# Altium PCB TB906_HW_V1.0.PcbDoc
Units mil, origin at the board's own origin, x right, y up, seen from the top; angles counter-clockwise.
Board outline 1310.5 x 1307.45 mil, 2 copper layers (Top, Bottom), stack 12.7 mil thick; 14 components, 16 nets, 74 pads, 167 vias.
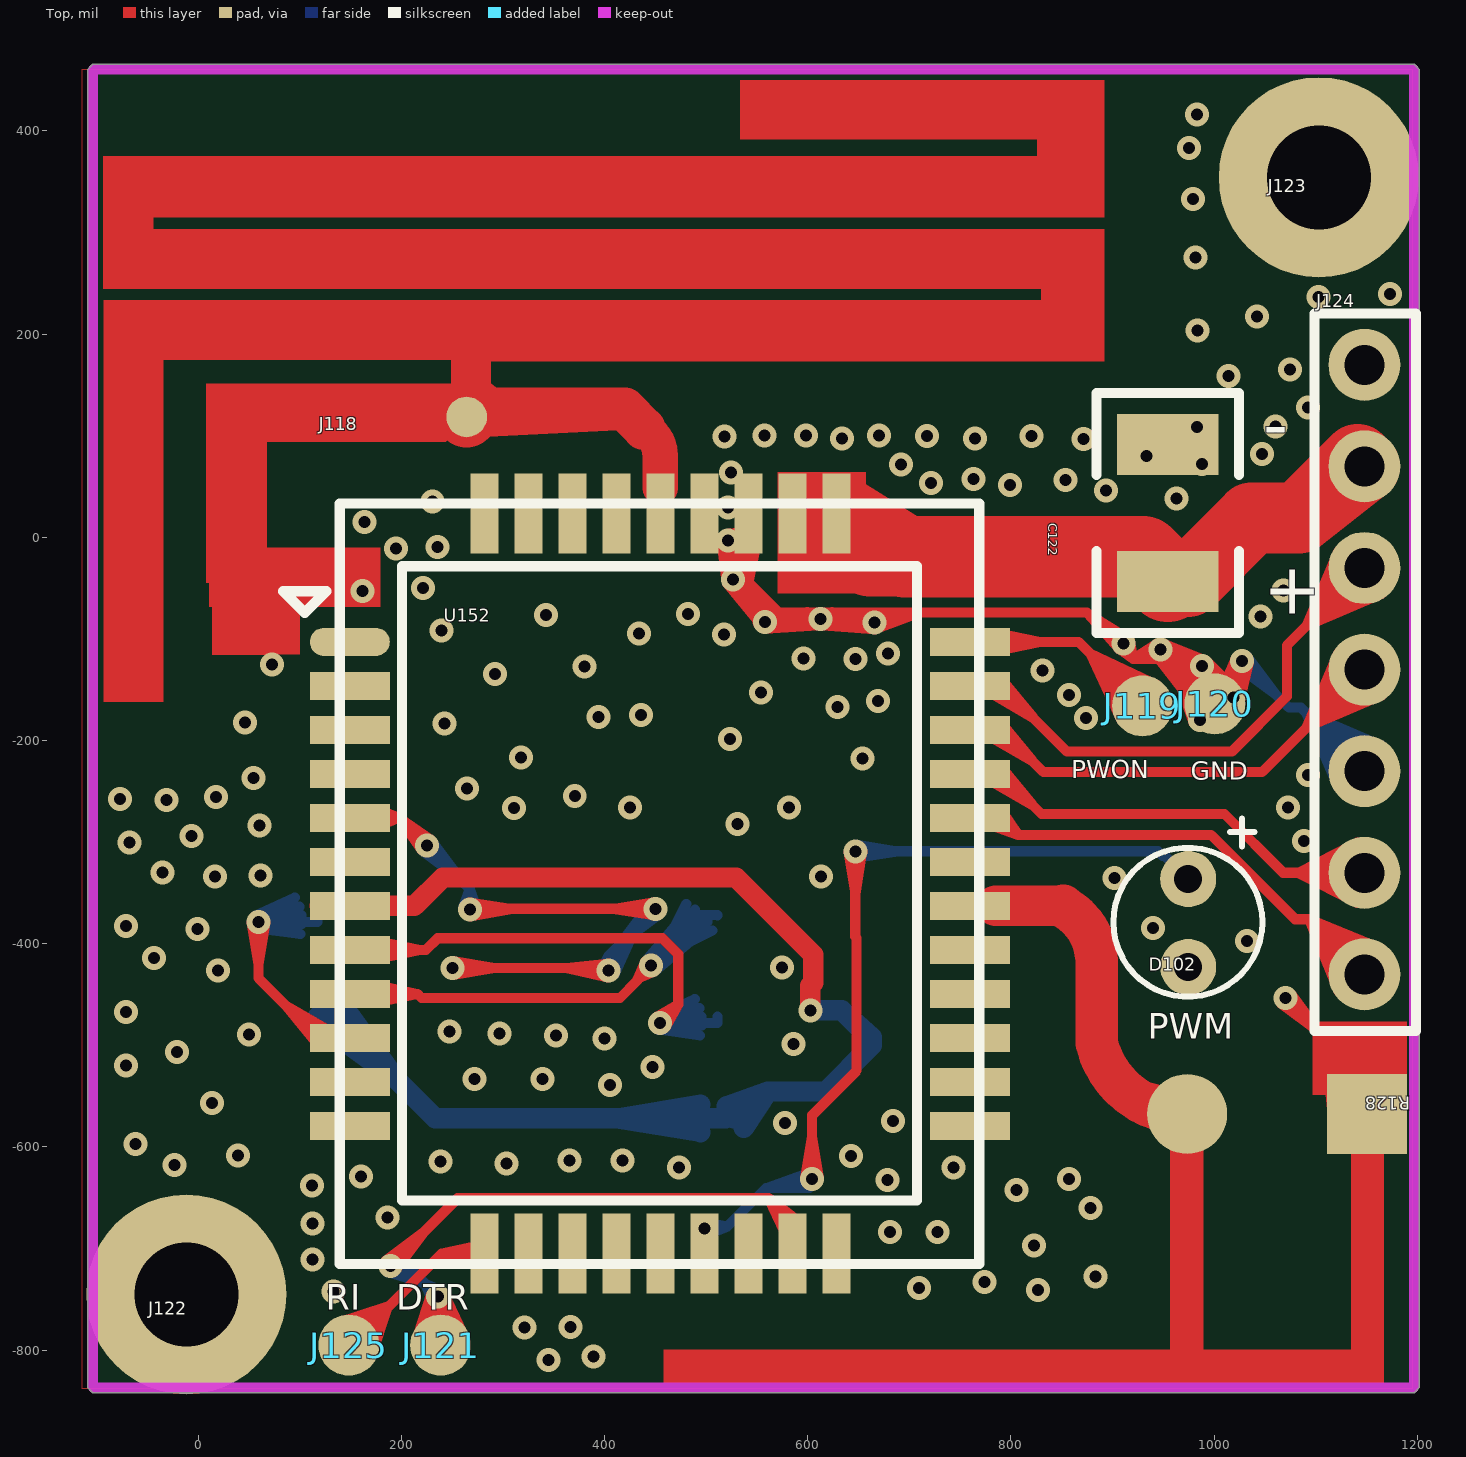
[diagram p0: Top view]
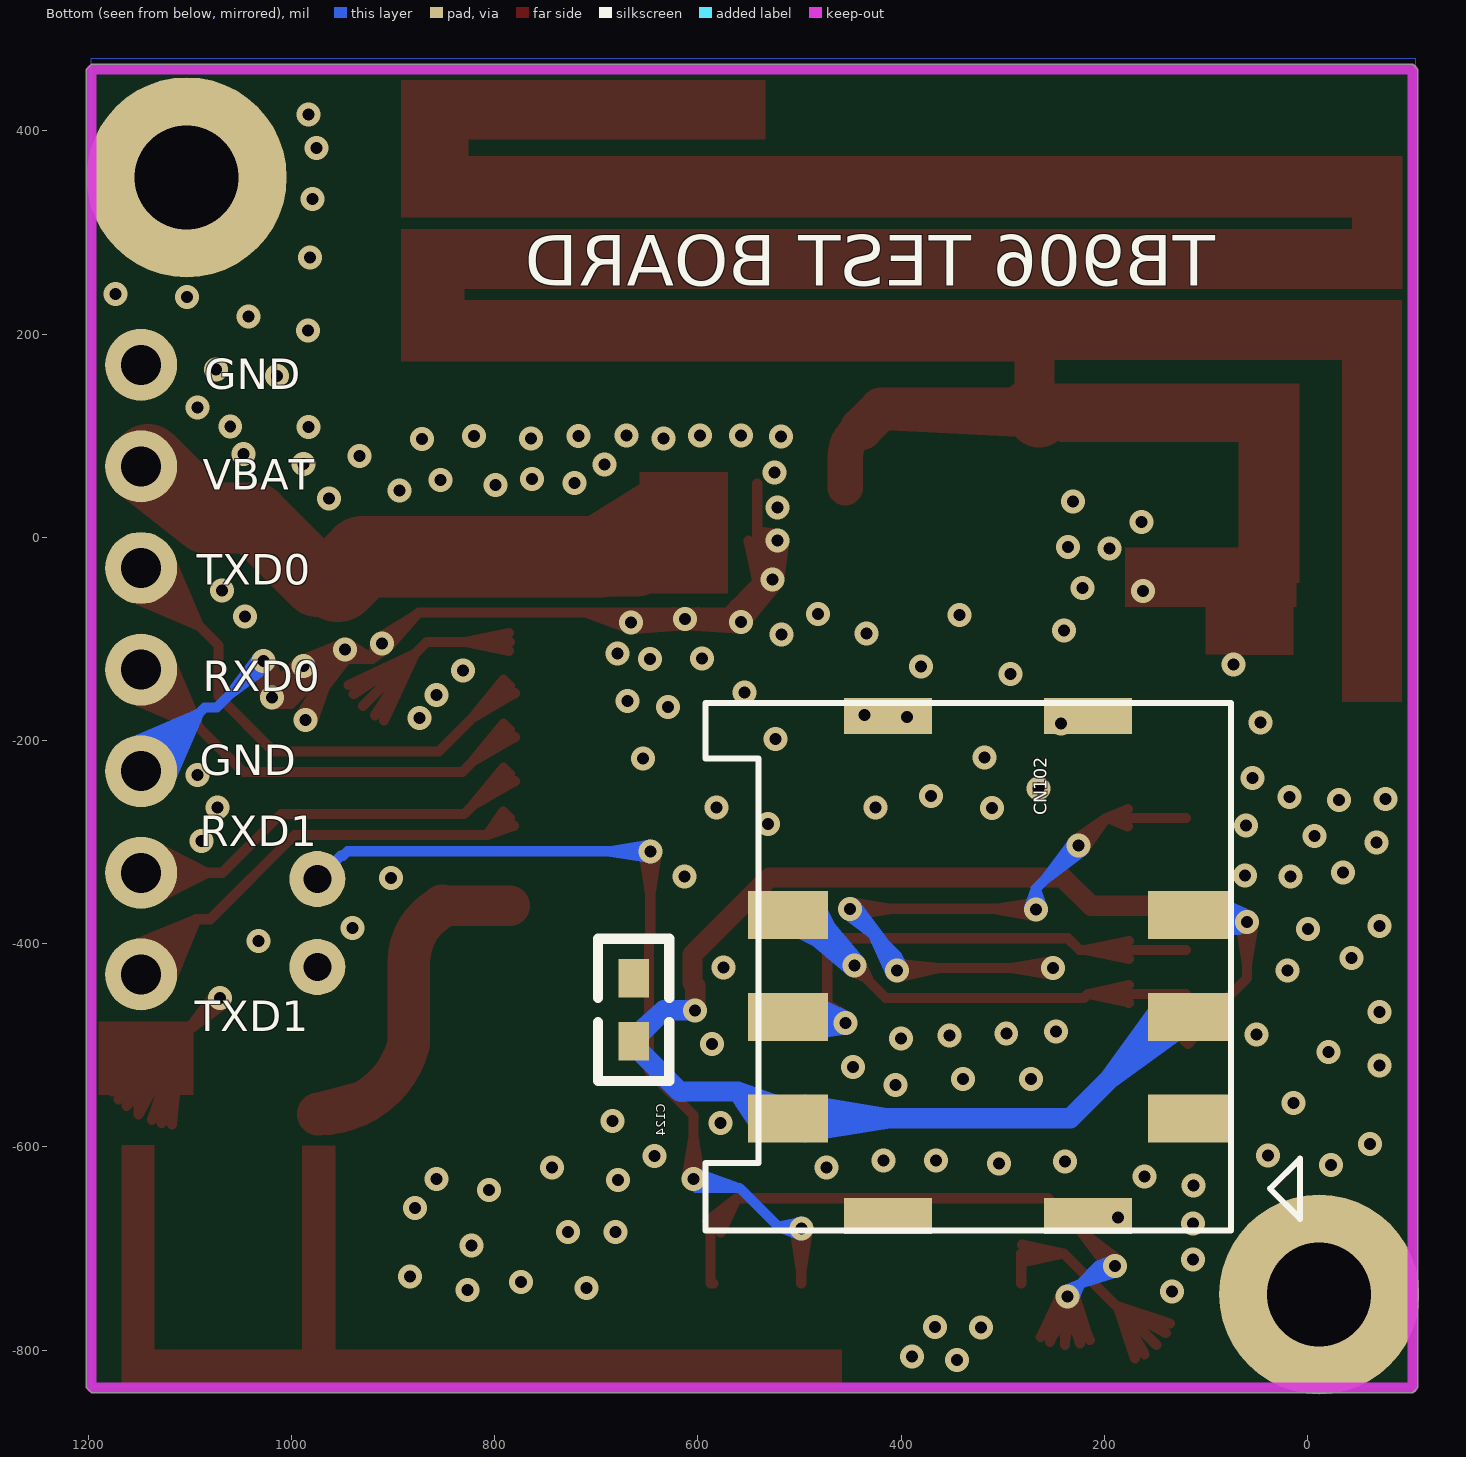
[diagram p1: Bottom view, seen from below]

## Layer stack, top to bottom
Top: signal copper 1.35
Dielectric: dielectric 10, FR-4, Dk 4.3
Bottom: signal copper 1.35

## Board outline
-108.57,-836.92 -103.57,-841.92 1196.93,-841.92 1201.93,-836.92 1201.93,460.53 1196.93,465.53 -103.57,465.53 -108.57,460.53

## Design rules (kind name [scope] priority, off if disabled: settings)
Clearance "'Default' PADS rule_15" [All] p1: gap=9
ComponentClearance "'Default' PADS rule_12" [All] p1: gap=6 collisioncheckmode=3 verticalgap=10 showdistances=FALSE
FlightTimeFalling "'Default' PADS rule_10" [All] p1: maximum=10.00
FlightTimeRising "'Default' PADS rule_9" [All] p1: maximum=10.00
Length "'Default' PADS rule_5" [All] p1: maxlimit=50000 minlimit=0
MatchedLengths "'Default' PADS rule_11" [InNetClass('All Nets')] p1: tolerance=200 checknetsindiffpair=TRUE checkdiffpairvsdiffpair=TRUE checkothers=TRUE
MaxMinImpedance "'Default' PADS rule_8" [All] p1: minimum=50.00 maximum=150.0
ParallelSegment "'Default' PADS rule_7" [All] p1: limit=1000 gap=200
ParallelSegment "'Default' PADS rule_6" [All] p2: limit=1000 gap=200
PasteMaskExpansion "Paste Mask Expansion from CAM settings" [All] p1: expansion=1
PlaneClearance "'Default' PADS rule_14" [All] p1: clearance=9
PlaneConnect "Power Plane Connect Style - from global settings" [All] p1: planeconnectstyle=Relief reliefexpansion=20 reliefentries=2 reliefconductorwidth=15 reliefairgap=10
PolygonConnect [All] p1: connectstyle=Relief reliefconductorwidth=10 reliefentries=4 polygonreliefangle="90 Angle"
RoutingLayers "'Default' PADS rule_3" [All] p1: top layer_v5=TRUE bottom layer_v5=TRUE
RoutingPriority "'Default' PADS rule_2" [All] p1: routingpriority=3
RoutingTopology "'Default' PADS rule" [All] p1: topology=Shortest
RoutingVias "'Default' PADS rule_4" [All] p1: holewidth=11.81 width=23.62 viastyle="Through Hole" minholewidth=11.81 minwidth=23.62 maxholewidth=11.81 maxwidth=23.62
SilkscreenOverComponentPads [All] p1: minsilkscreentomaskgap=10
SolderMaskExpansion "Solder Mask Expansion from CAM settings" [All] p1: expansion=1
Width "'Default' PADS rule_13" [All] p1: maxlimit=250 minlimit=8 preferedwidth=10
20 further rules are at their usual default settings.

## Components (designator, comment, footprint, x,y, rotation, side; value= is the part's Value field where it differs from the comment)
C122 "1210" 1210 954.39,23.93 r90 top
C124 "0603" 0603 663.14,-465.17 r90 bottom
CN102 "C790-6P" C790-6P 216.06,-667.99 r90 bottom
D102 "D3.9_LED" D3.9_LED 904.49,-709.15 r270 top
J118 "TB906_ANT" TB906_ANT 220.08,-28.46 r0 top
J119 "TP60MIL" TP60MIL 929.54,-165.93 r0 top
J120 "TP60MIL" TP60MIL 1000.79,-164 r0 top
J121 "TP60MIL" TP60MIL 238.81,-795.13 r0 top
J122 "VIA_2.5MM" VIA_2.5MM -11.57,-745.24 r0 top
J123 "VIA_2.5MM" VIA_2.5MM 1103.11,354.28 r0 top
J124 "SDIP_2.54_7P" SDIP_2.54_7P 1148.03,169.76 r180 top
J125 "TP60MIL" TP60MIL 148.44,-795.13 r0 top
R128 "BT_F_ANT" BT_F_ANT 973.56,-567.62 r180 top
U152 "HFY_QFN_42_DTU" HFY_QFN_42_DTU 139.5,33.2 r0 top

## Footprints (in the part's own frame and the unit in brackets; to place one, negate y for a bottom-side part, rotate by r counter-clockwise, add the part's x,y. Pads: shape width x height; smd on the part's side, far side on the other; paste and mask are expansions set on the pad)
0603 [mil]
  rect 38x30 smd: 1(-31,0) 2(31,0)
  silkscreen extent -70,-35 70,35
1210 [mil]
  rect 60x100 smd: 1(-67.5,0) 2(67.5,0)
  silkscreen extent -118,-70 118,70
BT_F_ANT [mm]
  round 2 smd: 1(0,0)
  rect 2x2 smd: 2(-4.494,0.005)
  Top region: 13.082,6.713 -4.915,6.713 -4.915,5.893 13.082,5.893 13.082,6.713
  Top region: -0.399,5.908 0.419,5.908 0.419,0.79 -0.399,0.79 -0.399,5.908
  Top region: -4.915,5.898 -4.097,5.898 -4.097,0.78 -4.915,0.78 -4.915,5.898
C790-6P [mm]
  rect 1.2x2 smd: C1(2.44,7.5) C2(4.98,7.5) C3(7.52,7.5) C5(2.44,-2.5) C6(4.98,-2.5) C7(7.52,-2.5)
  rect 0.9x2.2 smd: C4(12.5,0) C8(0,0) C9(0,5) C10(12.5,5)
  silkscreen extent -0.36,-5.31 12.83,9.56
D3.9_LED [mm]
  round 1.4 hole 0.7: 1(-9.47,1.78) 2(-7.27,1.78)
  silkscreen extent -10.98,-0.09 -6.53,3.63
HFY_QFN_42_DTU [mm]
  oval 2x0.7 smd: 1(0.25,-3.459)
  rect 2x0.7 smd: 2(0.25,-4.559) 3(0.25,-5.659) 4(0.25,-6.759) 5(0.25,-7.859) 6(0.25,-8.959) 7(0.25,-10.059) 8(0.25,-11.159) 9(0.25,-12.259) 10(0.25,-13.359) 11(0.25,-14.459) 12(0.25,-15.559) 22(15.75,-15.559) 23(15.75,-14.459) 24(15.75,-13.359) 25(15.75,-12.259) 26(15.75,-11.159) 27(15.75,-10.059) 28(15.75,-8.959) 29(15.75,-7.859) 30(15.75,-6.759) 31(15.75,-5.659) 32(15.75,-4.559) 33(15.75,-3.459)
  rect 0.7x2 smd: 13(3.612,-18.75) 14(4.712,-18.75) 15(5.812,-18.75) 16(6.912,-18.75) 17(8.012,-18.75) 18(9.112,-18.75) 19(10.212,-18.75) 20(11.312,-18.75) 21(12.412,-18.75) 34(12.412,-0.25) 35(11.312,-0.25) 36(10.212,-0.25) 37(9.112,-0.25) 38(8.012,-0.25) 39(6.912,-0.25) 40(5.812,-0.25) 41(4.712,-0.25) 42(3.612,-0.25)
  silkscreen extent -1.42,-19.01 15.99,0
SDIP_2.54_7P [mm]
  round 1.8 hole 1: 1(0,0) 2(0,2.54) 3(0,5.08) 4(0,7.62) 5(0,10.16) 6(0,12.7) 7(0,15.24)
  silkscreen extent -1.29,-1.28 1.25,16.65
TB906_ANT [mil]
  round 40 smd: 1(44.24,146.92)
  Top region: 671.88,343.45 671.88,478.24 313.66,478.24 313.66,420.41 605.92,420.41 605.92,343.45 671.88,343.45
  Top region: 29.25,179.48 29.25,203.03 -254.13,203.03 -254.13,-133.32 -312.94,-133.32 -312.94,262.01 610.05,262.01 610.05,273.29 -313.35,273.29 -313.35,403.48 671.94,403.48 671.94,343.31 -264.37,343.31 -264.37,331.56 672.01,331.56 672.01,201.85 67.8,201.85 67.8,127.69 28.87,127.69 23.9,122.72 -152.53,122.72 -152.53,-16.09 -211.84,-16.09 -211.84,179.48 29.25,179.48
TP60MIL [mil]
  round 60 smd: 1(0,0)
VIA_2.5MM [mm]
  round 5 hole 2.6: 1(0,0)

## Via types
v1: diameter 23.62, hole 11.81, Top to Bottom, 167 vias

## Nets (pads, with @x,y where several pads share a name; then routed paths per layer and width w, separated by ;. In a path a pad name is that pad's centre, name@x,y a point inside that pad or via, vN(x,y) a via of type N, cw(c..) or ccw(c..) an arc to the next point about the centre after c; other vN are vias at no path point)
DTR: J121.1 U152.20 | length 1881.2
  Top w10: v1@184.77,-711.88 222.24,-684.01 v1@194.37,-721.48 ; v1(189.22,-717.03) 255.63,-650.62 561.56,-650.62 ; J121.1@214.34,-790.01 v1(236.05,-747.27) ; J121.1@223.88,-793.64 v1(236.05,-747.27) ; v1@229.34,-746.08 J121.1@225.34,-788.1 ; v1@229.75,-744.67 J121.1@216.47,-785.83 ; v1@229.92,-750.24 251.55,-787.03 v1@242.57,-745.31 ; v1@230.68,-751.46 260.45,-784.09 v1@242,-743.96 ; v1@241.86,-750.82 J121.1@216.47,-785.83 ; v1@242.48,-749.52 J121.1@225.34,-788.1 ; J121.1@253.47,-791.93 v1(236.05,-747.27) ; J121.1@262.53,-787.23 v1(236.05,-747.27) ; U152.20@577.44,-684.08 561.56,-650.62 ; U152.20@584.87,-734.51 587.6,-734.51 587.6,-676.66 561.56,-650.62 ; U152.20@584.87,-679.4 561.56,-650.62 ; U152.20@590.99,-673.1 561.56,-650.62 ; J121.1@216.47,-785.83 v1(236.05,-747.27) ; J121.1@225.34,-788.1 v1(236.05,-747.27) ; v1(236.05,-747.27) J121.1 v1(236.05,-747.27) ; J121.1@238.46,-789.03 229.31,-748.21 J121.1@238.46,-789.03 ; J121.1@238.46,-789.03 242.86,-747.43 J121.1@238.46,-789.03
  Bottom w10: v1@186.68,-723.35 223.46,-734.45 ; v1@192.83,-711.26 223.46,-734.45 ; v1@230.4,-751.08 223.46,-734.68 ; v1(236.05,-747.27) 223.46,-734.68 ; v1@239.86,-741.62 223.46,-734.68 ; v1(189.22,-717.03) 206.03,-717.03 ; v1(189.22,-717.03) 223.46,-734.45 ; v1(189.22,-717.03) 206.03,-717.03 ; 206.03,-717.03 190.6,-723.7 206.03,-717.03 ; 206.03,-717.03 190.6,-710.36 206.03,-717.03 ; 206.03,-717.03 223.46,-734.45 ; 223.46,-734.68 223.46,-734.45
GND: C122.2 C124.2 CN102.C4 CN102.C5 CN102.C8 CN102.C9 CN102.C10 D102.2 J120.1 J122.1 J123.1 J124.1 J124.5 R128.2 U152.5 U152.26 U152.28 U152.36 U152.37 U152.39 U152.40 | length 13080.5
  Top w10: U152.5@119.82,-276.19 197.83,-276.19 ; U152.5@174.93,-276.2 197.83,-276.19 ; U152.5@176.62,-284.81 197.83,-276.19 ; U152.5@176.61,-267.58 197.83,-276.19 ; v1@219.95,-307.9 197.83,-276.19 ; v1@229.54,-298.31 197.83,-276.19 ; v1(250.64,-424.08) 401.65,-424.08 v1(404.13,-426.56) 362.04,-424.08 ; v1@251.19,-430.87 292.45,-424.08 v1@251.19,-417.29 ; v1@267.88,-359.5 309.25,-365.67 ; v1@268.08,-373.07 309.25,-365.67 ; v1@403.18,-433.3 362.04,-424.08 ; v1@403.98,-419.75 362.04,-424.08 ; v1@449.55,-372.46 408.29,-365.67 v1@449.55,-358.88 ; v1(450.1,-365.67) 268.05,-365.67 v1(267.43,-366.29) 309.25,-365.67 ; v1@515,-3.53 v1@520.2,-38.44 ; v1@515,-3.49 v1@520,-38.91 ; v1@514.99,-3.43 v1@519.74,-39.68 ; v1@515.45,-5.63 v1@533.12,-41.96 ; v1@515.9,-6.58 541.56,-44.25 ; v1@520.77,-45.34 v1@550.32,-81.27 ; v1@520.85,-37.37 U152.36@550.29,-3.15 ; v1@521.31,-46.01 v1@555.91,-78.78 ; v1@521.9,-46.58 v1@561.09,-75.72 ; v1@522.65,3.58 U152.36@541.56,-2.23 ; v1@522.93,-47.31 564.9,-67.59 ; v1@523.29,-9.82 U152.36@541.56,-2.23 ; U152.36@528.14,-0.69 541.56,-44.25 ; U152.36@528.47,-1.83 v1@533.12,-41.96 ; U152.36@528.54,-4.14 v1@520.2,-38.44 ; v1@530.56,-36.07 564.9,-67.59 ; v1@531.44,-36.91 v1@561.09,-75.72 ; v1@531.96,-37.58 v1@555.91,-78.78 ; v1@532.36,-44.58 U152.36@550.29,-3.15 ; v1@532.41,-38.33 v1@550.32,-81.27 ; v1@532.86,-43.36 U152.36@541.56,-2.23 ; v1@532.94,-43.03 U152.36@541.56,6.39 ; U152.36@541.56,52.89 541.56,-44.25 ; v1@551.28,-85.33 541.56,-44.25 ; v1@556.78,-76.49 599.55,-73.72 ; v1@556.89,-76.48 602.32,-74.08 ; v1@557.72,-90.04 v1@611.08,-86.97 ; v1@557.82,-76.42 v1(612.65,-80.34) ; v1@558.54,-90 v1(612.65,-80.34) ; v1@558.67,-76.48 v1@611.08,-86.97 ; v1@559.63,-89.78 602.32,-74.08 ; v1@559.79,-89.73 599.55,-73.72 ; v1@563.82,-80.12 541.56,-44.25 ; v1@612.2,-73.54 655.73,-74.08 ; v1@613.12,-73.55 571.39,-74.08 ; v1@663.8,-90.13 624.11,-73.69 ; v1@663.97,-90.18 v1@621.42,-74.08 ; v1@664.96,-76.9 710.03,-74.08 ; v1@665.02,-76.9 v1@614.15,-86.98 ; v1@665.04,-90.41 v1(612.65,-80.34) ; v1@665.89,-90.46 v1@614.15,-86.98 ; v1@665.89,-76.84 v1(612.65,-80.34) ; v1@666.83,-76.9 v1@621.42,-74.08 ; v1@666.95,-76.92 624.11,-73.69 ; v1@667.84,-90.18 710.03,-74.08 ; v1@905.95,-109.48 920.4,-119.65 ; v1@906.09,-109.63 875.9,-75.15 ; v1@914.87,-99.26 875.9,-75.15 ; v1@917.2,-102.27 920.4,-119.65 ; v1@941.47,-114.34 968.33,-149.07 ; v1@941.93,-114.96 972.97,-146.88 ; v1@942.73,-115.77 J120.1@980.27,-143.49 ; v1@943.69,-116.46 v1@983.53,-136.1 ; v1@944.22,-104.46 920.4,-119.65 ; v1@944.39,-116.82 v1@985.68,-131.47 ; v1@948.55,-117.27 920.4,-119.65 ; v1@950.86,-104.88 v1@985.68,-131.47 ; v1@951.49,-105.34 v1@983.53,-136.1 ; v1@952.3,-106.13 J120.1@980.27,-143.49 ; v1@952.99,-107.09 972.97,-146.88 ; v1@953.36,-107.79 968.33,-149.07 ; J120.1@979.61,-182.18 968.15,-138.95 ; J120.1@979.81,-182.7 965.07,-141.02 ; J120.1@979.95,-177.8 956.43,-119.65 ; v1@982.81,-131.24 J120.1@1014.63,-163.04 ; v1@982.83,-131.25 J120.1@1015.09,-163.41 ; v1@983.32,-131.76 J120.1@1010.05,-152.2 ; v1@985.07,-132.96 J120.1@1014.59,-143.15 ; J120.1@988.99,-173.26 956.43,-119.65 ; J120.1@991.77,-176.26 965.07,-141.02 ; J120.1@992.06,-176.75 968.15,-138.95 ; v1@992.16,-121.42 J120.1@1014.59,-143.15 ; v1@992.42,-121.63 J120.1@1022.76,-152.17 ; v1@992.43,-121.65 J120.1@1022.19,-151.83 ; v1@993.55,-122.88 J120.1@1010.05,-152.2 ; J120.1@1012.3,-158.4 J120.1@1014.59,-143.15 ; J120.1@1015.83,-151.92 J120.1 ; J120.1@1020.07,-164.64 J120.1 ; v1@1020.85,-121.93 J120.1@1025.71,-159.51 ; v1@1020.92,-120.71 v1(1019.09,-157.9) ; v1@1021.19,-119.53 J120.1@1013.26,-154.38 ; v1@1021.61,-118.53 J120.1@1003.03,-161.76 ; J120.1@1025,-154.52 J120.1@1014.59,-143.15 ; v1@1033.19,-125.65 J120.1@1003.03,-161.76 ; v1@1033.6,-125 J120.1@1013.26,-154.38 ; v1@1034.12,-123.84 v1(1019.09,-157.9) ; v1@1034.4,-122.63 J120.1@1025.71,-159.51 ; v1@1065.75,-458.74 1103.22,-486.61 v1@1075.35,-449.14 ; v1(1070.2,-453.59) 1150.5,-533.89 1150.5,-567.82 1109.34,-492.73 ; R128.2@1117.66,-577.95 1109.34,-492.73 ; R128.2@1127.68,-576.37 1109.34,-492.73 ; R128.2@1137.37,-573.64 1109.34,-492.73 ; R128.2@1162.48,-559.88 1109.34,-492.73 ; R128.2@1169.99,-553.18 1109.34,-492.73 ; R128.2@1176.71,-545.58 1109.34,-492.73 ; 197.83,-276.19 v1(225.17,-303.53) 197.83,-276.19 ; v1@519.74,-39.68 v1(521.8,-3.18) ; v1@519.74,-39.68 528.53,-4.19 v1@520,-38.91 ; v1@519.74,-39.68 U152.36@532.83,-3.15 ; v1@520,-38.91 v1(521.8,-3.18) ; v1@520,-38.91 U152.36@541.56,6.39 ; v1@520.2,-38.44 v1(521.8,-3.18) ; v1@520.2,-38.44 U152.36@541.56,-2.23 ; v1(521.8,-3.18) v1(526.33,-41.41) ; v1(521.8,-3.18) v1@533.12,-41.96 ; v1(521.8,-3.18) v1(526.33,-41.41) ; v1(521.8,-3.18) U152.36@541.56,6.39 ; v1(521.8,-3.18) U152.36@541.56,6.39 ; v1(521.8,-3.18) U152.36@541.56,-2.23 ; v1(521.8,-3.18) 541.56,-44.25 ; v1(526.33,-41.41) 515.13,-4.58 v1(526.33,-41.41) ; v1(526.33,-41.41) 528.61,-2.98 v1(526.33,-41.41) ; v1(526.33,-41.41) U152.36@532.83,-3.15 ; v1(526.33,-41.41) 541.56,-44.25 ; v1(526.33,-41.41) 541.56,-44.25 ; v1(526.33,-41.41) v1@555.91,-78.78 ; v1(526.33,-41.41) 541.56,-44.25 ; v1(526.33,-41.41) v1@561.09,-75.72 ; v1(526.33,-41.41) 541.56,-44.25 ; v1(526.33,-41.41) v1@550.32,-81.27 ; v1(526.33,-41.41) 541.56,-44.25 ; v1(526.33,-41.41) U152.36@541.56,6.39 ; v1(526.33,-41.41) 541.56,-44.25 ; v1(526.33,-41.41) 564.9,-67.59 ; v1(526.33,-41.41) 541.56,-44.25 ; v1(526.33,-41.41) U152.36@541.56,-2.23 ; v1(526.33,-41.41) 541.56,-44.25 ; v1(526.33,-41.41) U152.36@550.29,-3.15 ; v1@526.58,-48.22 541.56,-44.25 ; v1@526.58,-48.22 541.56,-44.25 ; v1@526.58,-48.22 541.56,-44.25 ; v1@526.58,-48.22 541.56,-44.25 ; v1@526.58,-48.22 541.56,-44.25 ; v1@526.58,-48.22 541.56,-44.25 ; v1@526.58,-48.22 541.56,-44.25 ; v1@526.58,-48.22 541.56,-44.25 ; v1@529.02,-35.15 541.56,-44.25 ; v1@529.02,-35.15 541.56,-44.25 ; v1@529.02,-35.15 541.56,-44.25 ; v1@529.02,-35.15 541.56,-44.25 ; v1@529.02,-35.15 541.56,-44.25 ; v1@529.02,-35.15 541.56,-44.25 ; v1@529.02,-35.15 541.56,-44.25 ; v1@529.02,-35.15 541.56,-44.25 ; U152.36@532.83,-3.15 v1@533.12,-41.96 ; U152.36@532.83,-3.15 541.56,-44.25 ; 541.56,-44.25 v1(557.76,-83.23) ; 541.56,-44.25 U152.36@541.56,-2.23 ; 541.56,-44.25 U152.36@550.29,-3.15 ; 541.56,-44.25 571.39,-74.08 ; U152.36@541.56,6.39 525.68,-8.77 U152.36@541.56,6.39 ; U152.36@541.56,6.39 519.82,3.33 U152.36@541.56,6.39 ; v1@555.22,-76.91 571.39,-74.08 ; v1@555.22,-76.91 571.39,-74.08 ; v1@555.22,-76.91 571.39,-74.08 ; v1@555.22,-76.91 571.39,-74.08 ; v1@555.22,-76.91 571.39,-74.08 ; v1(557.76,-83.23) 571.39,-74.08 ; v1(557.76,-83.23) 602.32,-74.08 ; v1(557.76,-83.23) 571.39,-74.08 ; v1(557.76,-83.23) v1(612.65,-80.34) ; v1(557.76,-83.23) 571.39,-74.08 ; v1(557.76,-83.23) 599.55,-73.72 ; v1(557.76,-83.23) 571.39,-74.08 ; v1(557.76,-83.23) v1@611.08,-86.97 ; v1(557.76,-83.23) 571.39,-74.08 ; v1@562.65,-87.97 571.39,-74.08 ; v1@562.65,-87.97 571.39,-74.08 ; v1@562.65,-87.97 571.39,-74.08 ; v1@562.65,-87.97 571.39,-74.08 ; v1@562.65,-87.97 571.39,-74.08 ; 571.39,-74.08 v1(612.65,-80.34) ; 571.39,-74.08 v1@611.08,-86.97 ; 571.39,-74.08 728.49,-74.08 728.6,-74.19 874.94,-74.19 920.4,-119.65 ; v1(612.65,-80.34) v1(665.9,-83.65) ; v1(612.65,-80.34) 655.73,-74.08 ; v1@614.15,-86.98 v1(665.9,-83.65) ; v1@614.15,-86.98 655.73,-74.08 ; v1@621.42,-74.08 v1(665.9,-83.65) ; 624.11,-73.69 v1(665.9,-83.65) ; v1(665.9,-83.65) 710.03,-74.08 ; 875.9,-75.15 v1(910.87,-104.77) 920.4,-119.65 ; 920.4,-119.65 v1(947.16,-110.6) ; 920.4,-119.65 956.43,-119.65 ; v1(947.16,-110.6) v1@983.53,-136.1 ; v1(947.16,-110.6) v1@985.68,-131.47 ; v1(947.16,-110.6) 972.97,-146.88 ; v1(947.16,-110.6) 968.33,-149.07 ; v1(947.16,-110.6) v1@985.17,-132.96 ; v1(947.16,-110.6) v1@985.17,-132.96 ; v1(947.16,-110.6) J120.1@980.27,-143.49 ; v1(947.16,-110.6) v1@987.58,-126.71 ; v1(947.16,-110.6) v1@988.78,-120.04 ; v1(947.16,-110.6) v1@987.58,-126.71 ; v1(947.16,-110.6) v1@988.78,-120.04 ; 956.43,-119.65 v1(987.98,-126.8) ; 956.43,-119.65 v1@988.78,-120.04 ; 956.43,-119.65 985.78,-133.25 956.43,-119.65 ; 956.43,-119.65 v1(987.98,-126.8) ; 956.43,-119.65 v1@988.78,-120.04 ; 956.43,-119.65 J120.1@1010.05,-152.2 ; 956.43,-119.65 J120.1@1014.59,-143.15 ; 956.43,-119.65 J120.1 ; 965.07,-141.02 v1(986.04,-179.94) 968.15,-138.95 ; v1@981.48,-129.77 v1(1019.09,-157.9) ; v1@981.48,-129.77 J120.1@1022.76,-152.17 ; v1@981.48,-129.77 J120.1@1014.63,-163.04 ; v1@981.71,-135 v1(1019.09,-157.9) ; v1@981.71,-135 J120.1@1022.19,-151.83 ; v1@981.71,-135 J120.1@1015.09,-163.41 ; v1@985.17,-132.96 944.17,-116.72 v1@985.17,-132.96 ; v1@985.17,-132.96 951.06,-105.01 v1@985.17,-132.96 ; v1@987.58,-126.71 945.14,-117.1 v1@987.58,-126.71 ; v1@987.58,-126.71 950.17,-104.49 v1@987.58,-126.71 ; v1(987.98,-126.8) v1(1019.09,-157.9) ; v1(987.98,-126.8) J120.1@1022.19,-151.83 ; v1(987.98,-126.8) J120.1@1015.09,-163.41 ; v1(987.98,-126.8) v1(1019.09,-157.9) ; v1(987.98,-126.8) J120.1@1022.76,-152.17 ; v1(987.98,-126.8) J120.1@1014.63,-163.04 ; v1(987.98,-126.8) J120.1@1010.05,-152.2 ; v1(987.98,-126.8) J120.1@1014.59,-143.15 ; v1@988.78,-120.04 946.19,-117.34 v1@988.78,-120.04 ; v1@988.78,-120.04 949.19,-104.1 v1@988.78,-120.04 ; J120.1 v1(1019.09,-157.9) ; J120.1 1027.66,-137.12 ; J120.1@1003.03,-161.76 v1(1027.66,-121.67) ; J120.1@1013.26,-154.38 v1(1027.66,-121.67) ; J120.1@1013.26,-154.38 1027.66,-137.12 ; J120.1@1014.59,-143.15 v1(1019.09,-157.9) ; J120.1@1014.63,-163.04 993.76,-123.19 J120.1@1015.09,-163.41 ; v1(1019.09,-157.9) v1(1027.66,-121.67) ; v1(1019.09,-157.9) 983.55,-131.97 v1(1019.09,-157.9) ; v1(1019.09,-157.9) 993.15,-122.37 v1(1019.09,-157.9) ; v1(1019.09,-157.9) 1027.66,-137.12 ; v1@1021.02,-123.17 1027.66,-137.12 ; v1@1021.02,-123.17 1027.66,-137.12 ; v1@1021.02,-123.17 1027.66,-137.12 ; v1@1021.02,-123.17 1027.66,-137.12 ; v1@1021.02,-123.17 1027.66,-137.12 ; J120.1@1022.19,-151.83 984.41,-132.6 J120.1@1022.76,-152.17 ; J120.1@1025.71,-159.51 v1(1027.66,-121.67) ; J120.1@1025.71,-159.51 1027.66,-137.12 ; 1027.66,-137.12 v1(1027.66,-121.67) ; 1027.66,-137.12 v1@1034.3,-123.17 ; 1027.66,-137.12 v1(1027.66,-121.67) ; 1027.66,-137.12 v1@1034.3,-123.17 ; 1027.66,-137.12 v1(1027.66,-121.67) ; 1027.66,-137.12 v1@1034.3,-123.17 ; 1027.66,-137.12 v1(1027.66,-121.67) ; 1027.66,-137.12 v1@1034.3,-123.17 ; 1027.66,-137.12 v1@1034.3,-123.17 ; 1027.66,-137.12 v1(1027.66,-121.67)
  Bottom w10: v1@220.72,-308.68 258.19,-336.55 v1@230.32,-299.08 ; v1(225.17,-303.53) 267.43,-345.79 ; v1@260.71,-365.16 267.43,-345.79 ; v1(267.43,-366.29) 267.43,-345.79 ; v1@274.15,-365.16 267.43,-345.79 ; v1@398.65,-422.52 429.86,-385.91 ; v1@410.13,-429.79 429.86,-385.91 ; v1@444.95,-361.22 417.08,-398.69 v1@454.55,-370.82 ; v1(450.1,-365.67) 404.13,-411.64 ; v1@1023.21,-126.82 1060.68,-154.69 v1@1032.81,-117.22 ; v1(1027.66,-121.67) 1073.59,-167.6 1085.4,-167.6 J124.5 1091.39,-173.59 ; J124.5@1122.81,-247.28 1091.39,-173.59 ; J124.5@1131.86,-242.73 1091.39,-173.59 ; J124.5@1140.19,-237.12 1091.39,-173.59 ; J124.5@1154.91,-222.4 1091.39,-173.59 ; J124.5@1160.52,-214.07 1091.39,-173.59 ; J124.5@1165.07,-205.03 1091.39,-173.59 ; v1(404.13,-426.56) 404.13,-411.64 ; v1(404.13,-426.56) 429.86,-385.91 ; v1(404.13,-426.56) 404.13,-411.64 ; 404.13,-411.64 410.76,-425.01 404.13,-411.64 ; 404.13,-411.64 397.5,-425.01 404.13,-411.64 ; v1@249.39,-422.83 v1(250.64,-424.08) v1@249.4,-422.83
  other v1: 345.14,-809.55 389.21,-806.31 321.17,-777.8 366.53,-777.15 133.25,-742.16 826.75,-740.97 709.46,-739.03 774.26,-733.19 883.13,-727.36 112.51,-711.05 822.86,-696.91 680.95,-683.95 727.61,-683.95 112.51,-675.41 186.6,-669.49 878.59,-659.97 805.37,-642.47 112.34,-637.95 678.66,-632.44 857.21,-631.46 160.58,-629.13 473.53,-620.06 743.46,-620.47 -22.97,-617.61 303.6,-616.59 238.49,-614.55 365.66,-613.54 417.54,-613.54 642.76,-608.91 39.09,-608.45 -61.63,-597.26 577.54,-576.31 684.03,-574.65 13.65,-556.56 405.34,-539.27 272.06,-533.16 339.21,-533.16 447.12,-521.41 -70.78,-519.94 -20.93,-506.71 586.21,-498.71 400.25,-493.49 352.43,-490.44 50.28,-489.42 296.48,-488.4 247.64,-486.37 -70.78,-467.04 19.76,-426.34 574.55,-423.41 -43.31,-414.13 1032.42,-397.34 -0.59,-385.65 939.75,-384.38 -70.78,-382.6 902.17,-335.13 16.71,-333.76 612.97,-333.92 61.47,-332.75 -35.18,-329.69 -67.73,-300.19 1088.42,-299.17 -6.69,-294.09 60.45,-283.91 530.84,-282.03 310.72,-266.62 425.03,-265.75 581.71,-265.75 1073.01,-266.04 -31.11,-258.48 -76.89,-257.46 17.72,-255.43 370.75,-254.41 264.94,-247.29 54.35,-237.11 1092.31,-233.72 653.94,-217.94 317.84,-216.77 523.72,-198.61 242.56,-183.19 46.21,-182.18 873.94,-177.99 394.14,-177.09 435.86,-175.06 629.52,-167.07 669.2,-160.97 857.33,-155.15 554.24,-152.83 292.41,-134.36 831.17,-131.34 380.27,-127.39 72.66,-125.2 646.91,-119.97 595.95,-119.25 679.1,-114.19 517.61,-95.86 434.19,-94.84 239.51,-91.63 1045.66,-78.2 342.63,-76.53 482,-75.51 161.64,-53.1 1068.14,-52.53 221.19,-49.92 194.74,-11.26 235.51,-9.69 163.58,14.93 521.8,29.21 230.97,35.02 963.14,38.04 893.8,45.88 799.12,51.32 721.36,53.26 853.55,56.5 763.07,57.55 524.39,63.56 692.08,71.59 988.33,72.05 933.25,79.83 1047.34,82.2 633.88,97.18 764.47,97.18 871.69,96.68 518.07,99.25 557.69,100.07 598.14,100.07 670.37,100.07 717.42,99.66 820.19,99.66 983.15,108.34 1060.26,108.99 1092.32,127.6 1014.25,158.88 1074.52,165.36 983.8,203.6 1042.12,217.2 1102.99,236.45 1173.18,239.5 981.67,275.42 979.08,333.09 975.19,382.99 983.33,416.1
GSM_GPRS: D102.1 U152.18 | length 1604.8
  Top w8: U152.18@490.49,-681.31 U152.18@498.25,-716.27 ; U152.18@498.25,-734.51 v1(498.25,-680.46) U152.18@498.25,-716.27 ; U152.18@506.01,-681.31 U152.18@498.25,-716.27
  Top w10: U152.18@491.46,-681.01 U152.18@498.25,-722.27 ; U152.18@498.25,-734.51 v1(498.25,-680.46) U152.18@498.25,-722.27 ; U152.18@505.04,-681.01 U152.18@498.25,-722.27 ; v1@597.58,-631.19 604.37,-589.93 v1@611.16,-631.19 ; v1(604.37,-631.74) 604.37,-568.73 648.2,-524.9 648.2,-394.34 646.87,-393 v1(646.87,-309.06) ; v1@640.08,-309.61 646.87,-350.87 v1@653.66,-309.61
  Bottom w10: v1@498.66,-673.66 520.97,-678.41 ; v1@499.87,-687.08 520.97,-678.41 ; v1@602.54,-625.18 560.55,-640.44 ; v1@605.18,-638.5 560.55,-640.44 ; v1(646.87,-309.06) 944.89,-309.06 949.37,-313.54 949.62,-313.29 951.54,-313.29 D102.1 ; v1@647.42,-315.85 688.68,-309.06 v1@647.42,-302.27 ; 520.97,-678.41 v1(498.25,-680.46) 500.3,-678.41 520.97,-678.41 ; 520.97,-678.41 558.94,-640.44 601.86,-640.44 604.37,-637.94 v1(604.37,-631.74) 560.55,-640.44
M_RXD: J124.4 U152.31 | length 1126.4
  Top w10: U152.31@780.14,-196.78 821.17,-220.11 ; U152.31@785.17,-189.58 821.17,-220.11 ; U152.31@789.11,-189.58 789.11,-186.85 787.91,-186.85 831.99,-230.93 1047.34,-230.93 J124.4 1091.38,-186.89 ; U152.31@791.45,-183.44 821.17,-220.11 ; J124.4@1122.81,-113.2 1091.38,-186.89 ; J124.4@1131.86,-117.75 1091.38,-186.89 ; J124.4@1140.19,-123.36 1091.38,-186.89 ; J124.4@1154.91,-138.08 1091.38,-186.89 ; J124.4@1160.52,-146.41 1091.38,-186.89 ; J124.4@1165.07,-155.46 1091.38,-186.89
M_TXD: J124.3 U152.32 | length 1202.4
  Top w10: U152.32@780.11,-153.45 822.08,-177.71 ; U152.32@785.17,-146.28 822.08,-177.71 ; U152.32@789.11,-146.27 789.11,-143.54 787.91,-143.54 855.3,-210.93 1017.49,-210.93 1071.69,-156.73 1071.69,-106.57 J124.3 1091.38,-86.88 ; U152.32@791.44,-140.13 822.08,-177.71 ; J124.3@1122.82,-13.2 1091.38,-86.88 ; J124.3@1131.86,-17.75 1091.38,-86.88 ; J124.3@1140.19,-23.36 1091.38,-86.88 ; J124.3@1154.91,-38.08 1091.38,-86.88 ; J124.3@1160.52,-46.41 1091.38,-86.88 ; J124.3@1165.07,-55.46 1091.38,-86.88
N17113903: R128.1 U152.27 | length 445.5
  Top w40: U152.27@785.17,-362.81 851.61,-362.81 U152.27@789.11,-362.81
  Top w42: 851.61,-362.81 853.32,-364.51 cw(c822.38,-418.29) 884.42,-418.29 884.42,-497.99 ; 884.43,-497.99 ccw(c973.56,-475.76) R128.1 927.63,-555.31
N17114069: J118.1 U152.38 | length 424.8
  Top w35: 438.95,107.15 cw(c423.55,79.79) 454.95,79.79 ; U152.38@454.95,48.95 454.95,79.79 ; U152.38@454.95,52.89 454.95,79.79
  Top w42: J118.1 412.1,126.29 ; J118.1@272.15,126.29 419.82,126.29 438.95,107.15
  Top w60: J118.1 J118.1@272.15,126.29
N17118893: J125.1 U152.13 | length 541
  Top w10: J125.1@135.36,-773.83 186.46,-757.11 ; J125.1@139.42,-783.15 186.46,-757.11 ; J125.1 186.46,-757.11 ; J125.1@160.42,-804.15 186.46,-757.11 ; J125.1@169.74,-808.21 186.46,-757.11 ; U152.13@280.8,-713.72 239.8,-704.99 ; U152.13@280.8,-696.26 239.8,-704.99 ; U152.13@281.72,-734.51 U152.13 ; 186.46,-757.11 187.67,-757.11 239.8,-704.99 ; 239.8,-704.99 U152.13 ; 239.8,-704.99 U152.13
PWON: J119.1 U152.33 | length 595.4
  Top w10: U152.33@786.05,-111.7 828.95,-102.97 ; U152.33@786.05,-94.23 828.95,-102.97 ; U152.33@789.11,-102.97 U152.33@785.17,-102.97 ; J119.1@909.08,-180.29 878.33,-114.72 ; J119.1@917.89,-175.38 878.33,-114.72 ; J119.1 866.58,-102.97 U152.33@785.17,-102.97 ; J119.1@938.99,-154.28 878.33,-114.72 ; J119.1@943.9,-145.47 878.33,-114.72 ; U152.33@785.17,-102.97 828.95,-102.97
SIM_CLK: CN102.C3 U152.9 | length 1722.2
  Top w10: U152.9@119.82,-449.42 215.89,-449.42 ; U152.9@174.93,-449.42 215.89,-449.42 ; U152.9@175.87,-440.7 215.89,-449.42 ; U152.9@175.88,-458.15 215.89,-449.42 ; v1@440.19,-417.56 432.42,-434.8 ; v1@449.66,-427.03 432.42,-434.8 ; 215.89,-449.42 219.84,-453.37 415.23,-453.37 432.42,-436.18 432.42,-434.8 ; 432.42,-434.8 v1(445.79,-421.43) 432.42,-434.8
  Bottom w10: v1@440.27,-417.44 469.53,-382.81 ; v1@440.83,-416.76 CN102.C3@474.3,-386.15 ; v1@441.96,-415.8 CN102.C3@481.18,-393.24 ; v1@442.71,-415.36 484.48,-398.01 ; v1@449.75,-426.97 484.48,-398.01 ; v1@450.42,-426.42 CN102.C3@481.18,-393.24 ; v1@451.39,-425.3 CN102.C3@474.3,-386.15 ; v1@451.84,-424.55 469.53,-382.81 ; CN102.C3@480.5,-361.01 454.32,-413.04 ; CN102.C3@489.07,-366.29 454.32,-413.04 ; CN102.C3@495.59,-371.93 454.32,-413.04 ; CN102.C3@501.2,-378.47 454.32,-413.04 ; CN102.C3@506.45,-387.05 454.32,-413.04 ; CN102.C3 511.34,-371.85 495.52,-371.85 445.86,-421.5 v1(445.79,-421.43) ; v1(445.79,-421.43) CN102.C3@478.89,-388.56 ; v1(445.79,-421.43) CN102.C3@474.3,-386.15 ; v1(445.79,-421.43) CN102.C3@481.18,-393.24 ; v1(445.79,-421.43) 469.53,-382.81 ; v1(445.79,-421.43) CN102.C3@478.87,-388.5 ; v1(445.79,-421.43) 484.48,-398.01 ; CN102.C3@478.87,-388.5 450.93,-425.89 CN102.C3@478.89,-388.56 ; CN102.C3@478.87,-388.5 441.35,-416.27 CN102.C3@478.89,-388.56
SIM_DATA: CN102.C7 U152.10 | length 1160.8
  Top w10: v1@52.67,-379.05 59.46,-420.31 v1@66.25,-379.05 ; v1(59.46,-378.5) 59.46,-433.91 121.02,-495.46 119.82,-495.46 U152.10@119.82,-492.73 ; U152.10@117.48,-498.87 87.05,-461.5 ; U152.10@123.75,-492.73 87.05,-461.5 ; U152.10@128.81,-485.56 87.05,-461.5
  Bottom w10: v1@56.13,-372.56 CN102.C7@95.11,-354.58 ; v1@57.61,-371.95 99.4,-363.7 v1@62.33,-384.68 ; v1@58.09,-385.17 100.07,-390.33 v1@61.89,-372.14 ; v1@58.97,-371.71 100.92,-372.08 v1@61.05,-385.12 ; v1@59.69,-385.31 101.24,-380.48 v1@60.34,-371.75 ; v1@60.01,-385.29 101.27,-378.5 v1@60.01,-371.71 ; v1@63.69,-383.84 CN102.C7@95.11,-354.58 ; CN102.C7@99.72,-363.58 v1(59.46,-378.5) ; CN102.C7@100.68,-390.51 v1(59.46,-378.5) ; CN102.C7@101.89,-371.93 v1(59.46,-378.5) ; CN102.C7@102.34,-380.54 v1(59.46,-378.5) ; CN102.C7 117.64,-378.5 v1(59.46,-378.5) ; v1(59.46,-378.5) CN102.C7@95.11,-354.58
SIM_RST: CN102.C2 U152.8 | length 1390
  Top w10: U152.8@119.82,-406.12 224.42,-406.12 235.93,-394.61 456.88,-394.61 472.61,-410.34 472.61,-459.97 ; U152.8@174.93,-406.12 218.71,-406.12 ; U152.8@175.81,-414.85 218.71,-406.12 ; U152.8@175.81,-397.38 218.71,-406.12 ; v1@450.44,-472.59 472.61,-459.97 ; v1(454.57,-478.01) 472.61,-459.97 ; v1@459.99,-482.14 472.61,-459.97
  Bottom w10: v1@451.2,-472.09 CN102.C2@488.79,-454.59 ; v1@452.73,-471.45 CN102.C2@493.44,-463.58 ; v1@453.06,-484.65 CN102.C2@494.11,-490.49 ; v1@454.13,-471.21 CN102.C2@495.59,-471.93 ; v1@454.71,-484.82 CN102.C2@495.96,-480.54 ; v1@455.12,-484.8 496.38,-478.01 v1@455.12,-471.22 ; v1@455.54,-471.27 CN102.C2@495.96,-480.54 ; v1@456.12,-484.64 CN102.C2@495.59,-471.93 ; v1@457.15,-471.71 CN102.C2@494.11,-490.49 ; v1@457.46,-484.18 CN102.C2@493.44,-463.58 ; v1@458.86,-483.3 CN102.C2@488.79,-454.59 ; CN102.C2 511.34,-478.01 v1(454.57,-478.01) ; v1(454.57,-478.01) CN102.C2@495.59,-471.93 ; v1(454.57,-478.01) CN102.C2@493.44,-463.58 ; v1(454.57,-478.01) CN102.C2@495.96,-480.54 ; v1(454.57,-478.01) CN102.C2@488.79,-454.59 ; v1(454.57,-478.01) CN102.C2@494.11,-490.49
SIM_VCC: C124.1 CN102.C1 CN102.C6 U152.7 | length 2055.7
  Top w20: U152.7@119.82,-362.81 213.03,-362.81 ; U152.7@174.93,-362.81 213.03,-362.81 ; v1(602.68,-465.65) 602.68,-441.35 605.37,-438.66 605.37,-410.65 529.57,-334.86 240.98,-334.86 213.03,-362.81
  Bottom w20: CN102.C6 CN102.C6@133.39,-471.93 ; CN102.C6@124.54,-482.29 194.42,-532.96 ; CN102.C6@143.74,-463.08 194.42,-532.96 ; CN102.C1@494.48,-585.5 411.97,-571.93 ; CN102.C1@494.48,-558.35 411.97,-571.93 ; CN102.C1@495.59,-571.93 411.97,-571.93 ; CN102.C1@520.48,-560.01 560.71,-545.5 ; CN102.C1@527.08,-571.93 560.71,-545.5 ; CN102.C1@537.1,-581.16 560.71,-545.5 ; v1(602.68,-465.65) 633.74,-465.65 ; C124.1@663.14,-492.17 633.74,-465.65 ; CN102.C6@133.38,-471.93 194.42,-532.96 ; CN102.C6@133.39,-471.93 233.39,-571.93 CN102.C1 519.44,-571.93 540.71,-558.31 560.71,-545.5 ; 560.71,-545.5 617.81,-545.5 ; 617.81,-545.5 C124.1@663.14,-500.17 ; 617.81,-545.5 C124.1@663.14,-500.17 ; 633.74,-465.65 663.14,-495.04 C124.1 C124.1@663.14,-500.17
UART_RXD1: J124.6 U152.30 | length 939.4
  Top w10: U152.30@780.14,-240.09 821.09,-263.34 ; U152.30@785.17,-232.89 821.09,-263.34 ; U152.30@789.11,-232.89 789.11,-230.15 787.91,-230.15 830.09,-272.34 1010.24,-272.34 1068.14,-330.24 J124.6 ; U152.30@791.45,-226.75 821.09,-263.34 ; J124.6@1140.95,-359.84 1082.6,-330.24 ; J124.6@1140.95,-300.64 1082.6,-330.24 ; J124.6@1144.84,-350.42 1082.6,-330.24 ; J124.6@1144.84,-310.06 1082.6,-330.24 ; J124.6@1147.2,-340.64 1082.6,-330.24 ; J124.6@1147.2,-319.84 1082.6,-330.24
UART_TXD1: J124.7 U152.29 | length 1050.4
  Top w10: U152.29@781.05,-283.95 807.49,-293.04 ; U152.29@785.17,-276.2 807.49,-293.04 ; U152.29@789.11,-276.19 789.11,-273.46 787.91,-273.46 807.49,-293.04 ; U152.29@791.49,-270.11 807.49,-293.04 ; J124.7@1122.67,-447.07 1093.74,-375.94 ; J124.7@1131.79,-442.64 1093.74,-375.94 ; J124.7@1140.17,-437.1 1093.74,-375.94 ; J124.7@1154.89,-422.38 1093.74,-375.94 ; J124.7@1160.43,-414 1093.74,-375.94 ; J124.7@1164.86,-404.88 1093.74,-375.94 ; 807.49,-293.04 997.07,-293.04 1079.97,-375.94 1093.74,-375.94 ; 1093.74,-375.94 J124.7 1093.74,-375.94
VBATT_3V8: C122.1 J124.2 U152.34 U152.35 | length 1702.8
  Top w10: U152.35@584.87,52.89 U152.35 ; U152.34@619.44,52.89 628.18,52.89 628.18,15.16 624.08,19.26 U152.34@619.97,23.36 ; U152.34@625.53,14.98 U152.35@585.96,32.07 ; U152.34@625.53,31.73 U152.35@585.97,14.65 ; U152.34@629.06,14.62 U152.35@585.97,14.65 ; U152.34@629.06,32.09 U152.35@585.96,32.07 ; U152.35 U152.34 ; U152.35 627.28,32.09 U152.35 ; U152.35 627.28,14.62 U152.35 ; U152.35 U152.34 ; U152.35 U152.34@619.97,23.36 ; U152.35 U152.34@619.97,23.36 ; U152.35@585.97,14.65 U152.34 ; U152.35@585.97,14.65 U152.34@619.97,23.36 ; U152.35@585.96,32.07 U152.34 ; U152.35@585.96,32.07 U152.34@619.97,23.36
  Top w70: C122.1 C122.1@974.39,-43.57 ; C122.1@974.39,-43.57 1036.96,19 ; C122.1@974.39,-43.57 1036.96,19 ; 1036.96,19 1083.52,19 ; 1083.52,19 J124.2 1141.16,76.64 1083.52,19
  Top w80: U152.34 694.53,-18.15 ; U152.34@628.18,15.16 661.48,-18.15 ; C122.1 930,-19.19 741.43,-19.19 741.33,-19.08 695.47,-19.08 694.53,-18.15 ; U152.34@628.17,-2.23 661.48,-18.15 ; U152.34@628.17,-2.23 661.48,-18.15 ; U152.34@628.17,-2.23 661.48,-18.15 ; 661.48,-18.15 694.53,-18.15
pads on no net: U152.1 U152.2 U152.3 U152.4 U152.6 U152.11 U152.12 U152.14 U152.15 U152.16 U152.17 U152.19 U152.21 U152.22 U152.23 U152.24 U152.25 U152.41 U152.42

## Polygon pours and split planes (outlines as drawn)
GND on Bottom "Bottom-GND" (solid, remove dead copper, pour order 2): -106.52,470.84 1197.47,470.84 1197.47,-835.67 -106.52,-835.67
GND on Top "Top-GND" (solid, remove dead copper, pour order 4): -114.04,460.8 1194.96,460.8 1194.96,-838.18 -114.04,-838.18

## Keep-outs
Keep-Out Layer:
  lines w10: -103.57,-836.92 -103.57,460.53 1196.93,460.53 1196.93,-836.92 -103.57,-836.92

## Other copper
Top:
  region net VBATT_3V8: 570.59,64.19 657.07,64.19 657.07,-54.84 570.59,-54.84 570.59,64.19
  region net GND: 54.17,-51.73 99.98,-51.73 99.98,-115.3 54.17,-115.3 54.17,-51.73
  region net GND: 1096.92,-476.9 1189.58,-476.9 1189.58,-548.83 1096.92,-548.83 1096.92,-476.9
  pour cut-out: 935.75,-496.43 1198.23,-496.43 1198.23,-835.21 430.12,-835.21 430.12,-767.05 916.42,-767.05 916.42,-495.41 935.75,-495.41 935.75,-496.43
  region net GND: 10.96,-10.13 179.44,-10.13 179.44,-68.45 10.96,-68.45 10.96,-10.13
  region net GND: 14.2,-26.97 69.28,-26.97 69.28,-115.75 14.2,-115.75 14.2,-26.97
  pour cut-out: 327.15,67.77 327.15,157.2 461.07,157.2 489.21,129.07 938.21,129.07 938.21,460.04 -105.59,460.04 -105.59,-218.53 16.48,-218.53 16.48,-91.37 81.6,-91.37 120.77,-52.19 120.77,67.77 327.15,67.77
Bottom:
  pour cut-out: 326.21,68.18 326.21,157.61 460.13,157.61 488.27,129.48 937.27,129.48 937.27,460.45 -106.53,460.45 -106.53,-218.12 15.54,-218.12 15.54,-90.96 80.66,-90.96 119.83,-51.78 119.83,68.18 326.21,68.18
  pour cut-out: 934.74,-495.41 1197.22,-495.41 1197.22,-834.19 429.11,-834.19 429.11,-766.03 915.41,-766.03 915.41,-494.39 934.74,-494.39 934.74,-495.41

## Silkscreen, mask and mechanical layers (free items; w line width, h text height)
Silkscreen Top:
  text "-" at 1048.5,86.47 h50
  text "+" at 1048.5,-75.29 h50
  text "PWON" at 859.33,-236.97 h18
  text "GND" at 977.22,-238.67 h18
  text "PWM" at 934.92,-493.78 h25
  text "RI" at 125.66,-760.49 h25
  text "DTR" at 194.84,-760.49 h25
Silkscreen Bottom:
  text "TB906 TEST BOARD" at 90.85,247.77 h50
  text "GND" at 1086.09,145.47 h30
  text "VBAT" at 1087.17,46.8 h30
  text "TXD0" at 1093.27,-46.8 h30
  text "RXD0" at 1087.17,-151.59 h30
  text "GND" at 1090.21,-233.99 h30
  text "RXD1" at 1090.21,-304.19 h30
  text "TXD1" at 1095.3,-486.3 h30